# EAGLE board mikroAmpMeterV140_MainBoard (EAGLE 6.3)
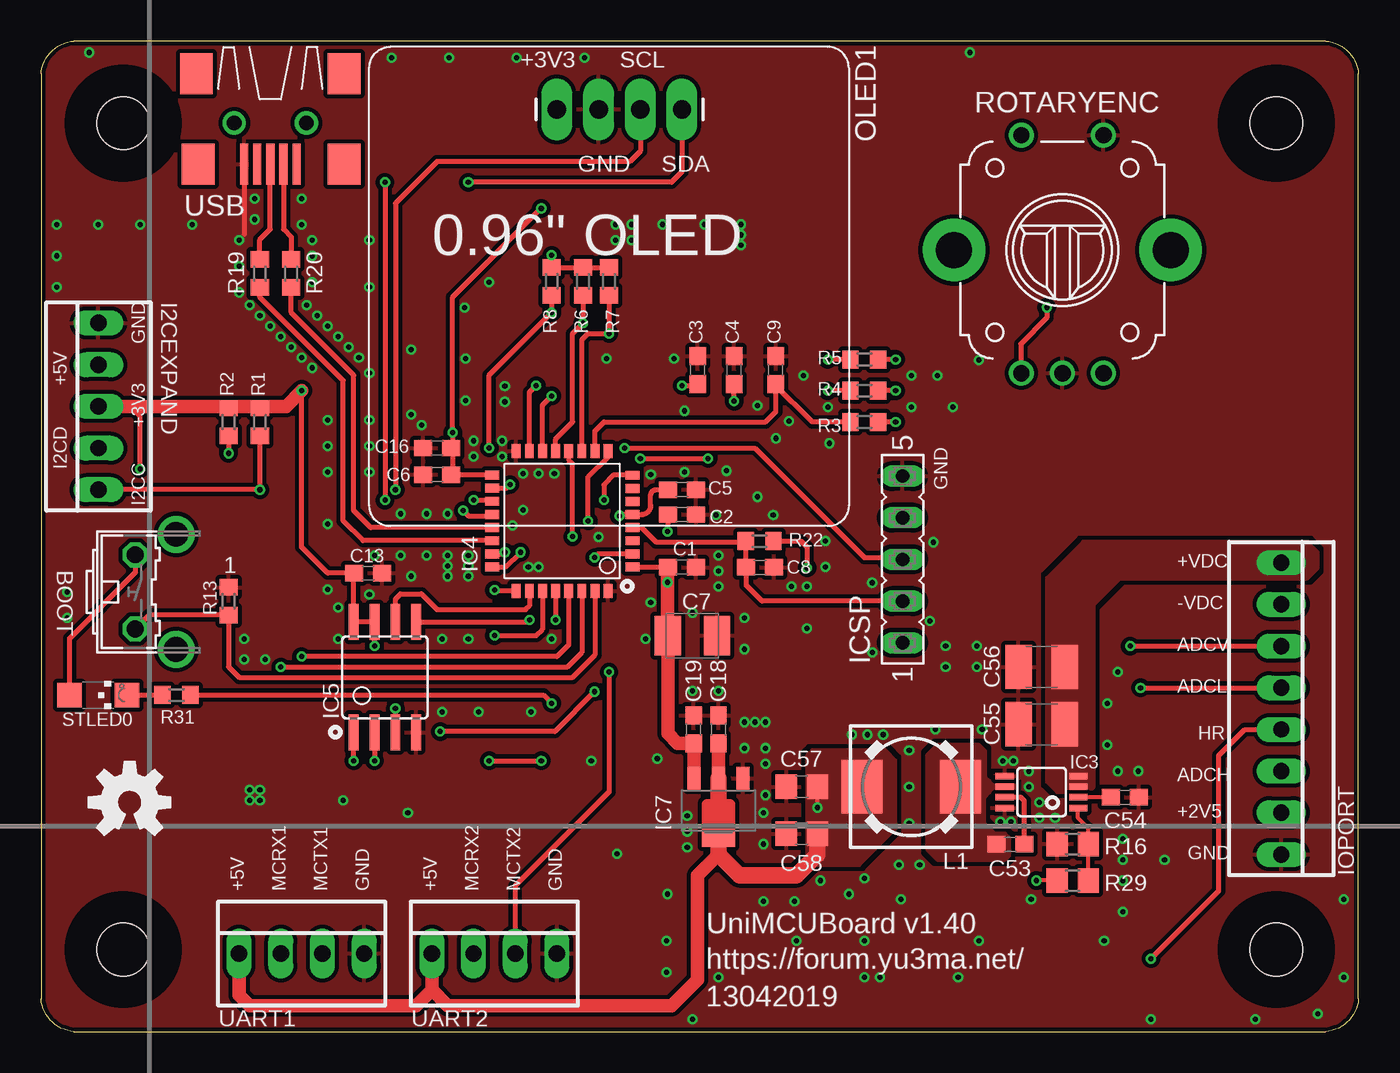
[diagram p0: board, top side]
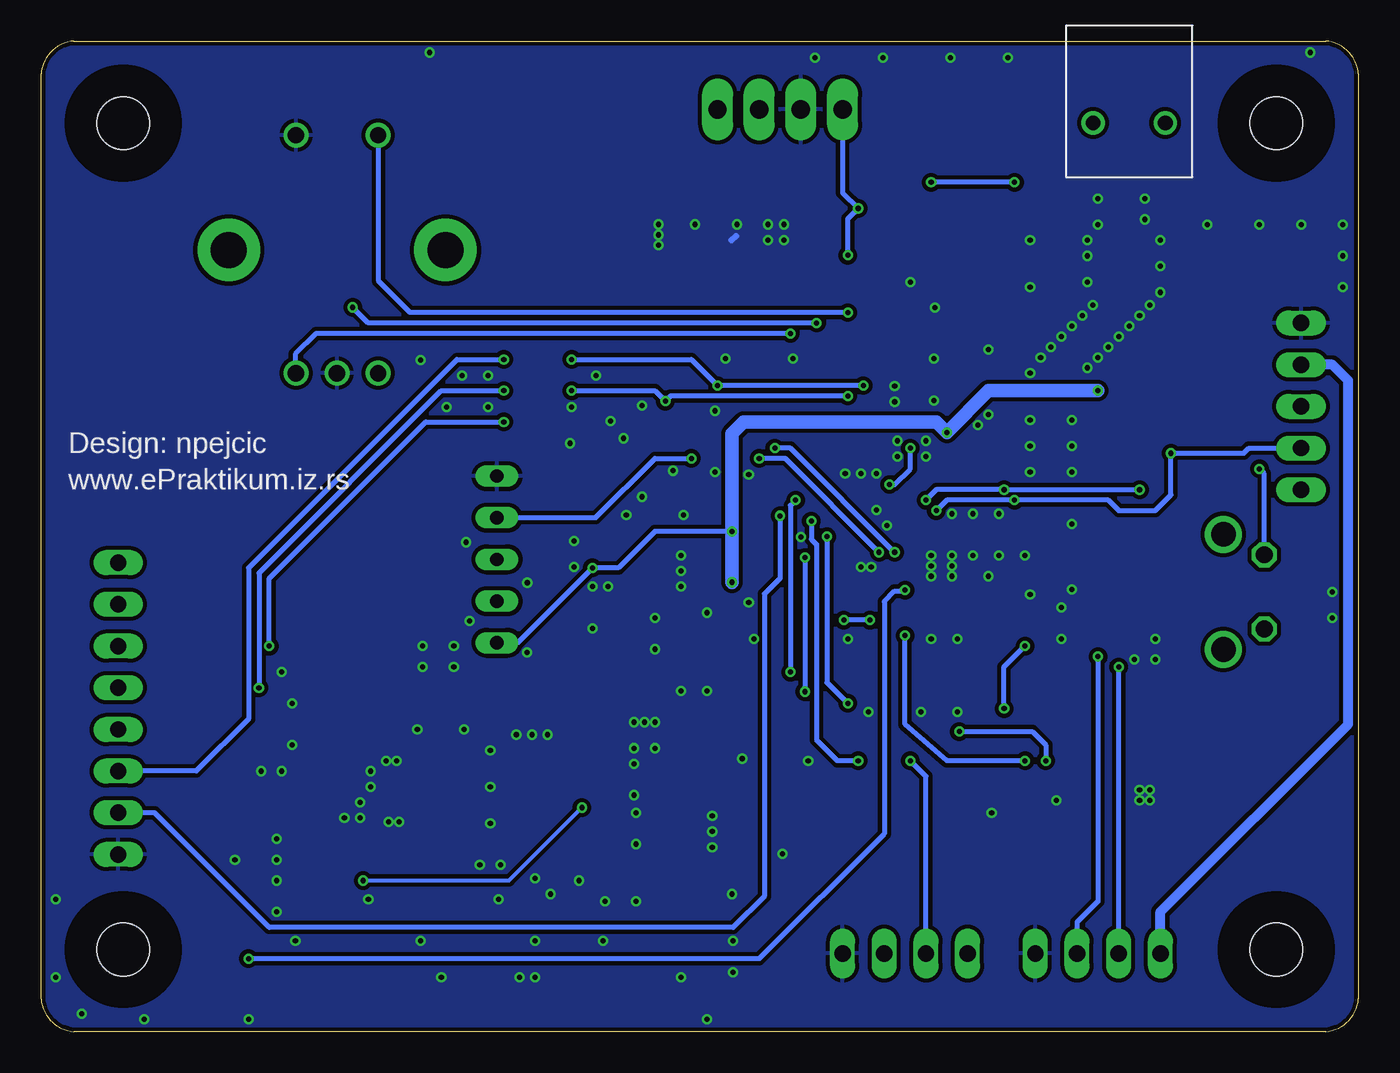
[diagram p1: board, bottom side, seen from below]

Size 80.27 x 60.36 mm. Coordinates in mm from the lower left corner, seen from the top.
Outline: 2,0 78.27,0 arc81 80.27,2 80.27,58.36 arc81 78.27,60.36 2,60.36 arc81 0,58.36 0,2 arc81 2,0
Copper layers (1*16): Top 0.035mm / dielectric 1.5mm / Bottom 0.035mm
Design rules "ITEADstudio_DRC": minimum track width 6mil, minimum drill 12mil, track to track 6mil, track to pad 6mil, pad to pad 6mil, via to via 6mil, smd to smd 0mil, copper to edge 10mil, drill to drill 10mil, minimum pad ring 10mil, minimum via ring 6mil, stop-mask expansion 2mil, vias tented up to drill 100mil, thermal gap 10mil
Holes 3.2 mm at 5,5 75.27,55.36 5,55.36 75.27,5
tRestrict: area 2,2 to 8,8; area 72.3,52.4 to 78.3,58.4; area 2,52.4 to 8,58.4; area 72.3,2 to 78.3,8
bRestrict: area 2,2 to 8,8; area 72.3,52.4 to 78.3,58.4; area 2,52.4 to 8,58.4; area 72.3,2 to 78.3,8

## Footprints (pad centres in the part's own frame; a part is rotated, then mirrored left to right if it is on the bottom)
B3F-31XX = drill 1.016 octagon: 1 -2.261,-1.245; 2 2.261,-1.245 | drill 1.499 pad 2.159: 3 -3.505,1.245; 4 3.505,1.245
C0603 = smd 1.1 x 1: 1 -0.85,0; 2 0.85,0
SMC_B = smd 1.6 x 2.4: + -1.5,0; - 1.5,0
C1210 = smd 1.6 x 2.7: 1 -1.4,0; 2 1.4,0
C0805 = smd 1.3 x 1.5: 1 -0.95,0; 2 0.95,0
22-23-2051 = drill 1 long: 1 -5.08,0; 2 -2.54,0; 3 0,0; 4 2.54,0; 5 5.08,0
MSOP8 = smd 0.4 x 1.1: 1 -0.975,-2.25; 2 -0.325,-2.25; 3 0.325,-2.25; 4 0.975,-2.25; 5 0.975,2.25; 6 0.325,2.25; 7 -0.325,2.25; 8 -0.975,2.25
LQFP32 = smd 0.54 x 0.85: 1 -2.8,-4.275; 2 -2,-4.275; 3 -1.2,-4.275; 4 -0.4,-4.275; 5 0.4,-4.275; 6 1.19,-4.275; 7 1.99,-4.275; 8 2.79,-4.275; 17 2.8,4.275; 18 2,4.275; 19 1.2,4.275; 20 0.4,4.275; 21 -0.4,4.275; 22 -1.2,4.275; 23 -2,4.275; 24 -2.8,4.275 | smd 0.85 x 0.54: 9 4.275,-2.8; 10 4.275,-2; 11 4.275,-1.2; 12 4.275,-0.4; 13 4.275,0.4; 14 4.275,1.2; 15 4.275,2; 16 4.275,2.8; 25 -4.275,2.8; 26 -4.275,2; 27 -4.275,1.2; 28 -4.275,0.4; 29 -4.275,-0.4; 30 -4.275,-1.2; 31 -4.275,-2; 32 -4.275,-2.8
SOIC8 = smd 0.6 x 2.2: 1 -1.905,-3.365; 2 -0.635,-3.365; 3 0.635,-3.365; 4 1.905,-3.365; 5 1.905,3.365; 6 0.635,3.365; 7 -0.635,3.365; 8 -1.905,3.365
SOT89 = smd 2.032 x 1.27: C@1 0,1.575 | smd 0.8 x 1.4: GND -1.499,-1.981; VIN 0,-1.981; VOUT 1.499,-1.981
FE05-1 = drill 0.813 long: 1 -5.08,0; 2 -2.54,0; 3 0,0; 4 2.54,0; 5 5.08,0
22-23-2081 = drill 1 long: 1 -8.89,0; 2 -6.35,0; 3 -3.81,0; 4 -1.27,0; 5 1.27,0; 6 3.81,0; 7 6.35,0; 8 8.89,0
DR73 = smd 2.5 x 3.25: 1 -3,0; 2 3,0
I2C_OLED_PACKAGE = drill 1.118 pad 1.88 long: 1 0,0; 2 2.54,0; 3 5.08,0; 4 7.62,0
R0603 = smd 1 x 1.1: 1 -0.85,0; 2 0.85,0
R0805 = smd 1.3 x 1.5: 1 -0.95,0; 2 0.95,0
PEC12_INCREMENTAL_ENCODER = drill 1: A -2.5,-7.5; B 2.5,-7.5; C 0,-7.5; P1 -2.5,7; P2 2.5,7 | drill 2.2 pad 3.81: GND@1 -6.6,0; GND@2 6.6,0
CHIPLED_1206 = smd 1.5 x 1.5: A 0,-1.75; C 0,1.75
22-23-2041 = drill 1 long: 1 -3.81,0; 2 -1.27,0; 3 1.27,0; 4 3.81,0
USB-MB-S = smd 2.5 x 0.5: D+ 2.5,0; D- 2.5,0.8; GND 2.5,-1.6; ID 2.5,-0.8; VBUS 2.5,1.6 | smd 2.5 x 2: P$1 -3,-4.5; P$2 -3,4.5; P$3 2.5,-4.4; P$4 2.5,4.5 | drill 0.9: P$5 0,2.2; P$6 0,-2.2

## Placement (x,y rotation side)
BOOT  [B3F-31XX]  6.99,26.8 270 top
C1  100nF  [C0603]  39.05,28.3 0 top
C2  10uF/6.3V  [C0603]  39.05,31.51 0 top
C3  10nF  [C0603]  40.01,40.32 90 top
C4  10nF  [C0603]  42.23,40.32 90 top
C5  1uF  [C0603]  39.05,33.02 0 top
C6  100nF  [C0603]  24.13,33.93 0 top
C7  100uF/6.3V TANT  [SMC_B]  39.69,24.13 0 top
C8  100nF  [C0603]  43.81,28.3 180 top
C9  10nF  [C0603]  44.77,40.32 90 top
C13  100n  [C0603]  19.92,27.94 180 top
C16  10uF/6.3V  [C0603]  24.13,35.56 0 top
C18  10uF/16V  [C0603]  41.27,18.41 90 top
C19  10uF/16V  [C0603]  39.77,18.41 90 top
C53  100nF  [C0603]  59.05,11.43 180 top
C54  1uF/16V  [C0603]  66.04,14.29 180 top
C55  4.7uF/50V  [C1210]  60.96,18.73 180 top
C56  4.7uF/50V  [C1210]  60.96,22.23 180 top
C57  10uF/16V  [C0805]  46.35,14.92 180 top
C58  10uF/16V  [C0805]  46.35,12.06 180 top
I2CEXPAND  22-23-2051  [22-23-2051]  3.49,38.1 90 top
IC3  MCP16312-E/MS  [MSOP8]  60.96,14.61 90 top
IC4  STM32L082KZT6  [LQFP32]  31.75,31.11 90 top
IC5  SST26VF032B-104I/SM  [SOIC8]  20.95,21.59 0 top
IC7  MCP1700T-3302E/MB  [SOT89]  41.27,13.46 180 top
ICSP  [FE05-1]  52.49,28.77 90 top
IOPORT  22-23-2081  [22-23-2081]  75.56,19.68 270 top
L1  22uH  [DR73]  53.02,14.92 180 top
LOGO1  OSHW-LOGOM  [OSHW-LOGO-M]  5.4,13.97 0 top
OLED1  WEA012864DWPP3N00003  [I2C_OLED_PACKAGE]  31.43,56.2 0 top
R1  4k7  [R0603]  13.34,37.15 90 top
R2  4k7  [R0603]  11.43,37.15 90 top
R3  1k  [R0603]  50.16,37.15 180 top
R4  1k  [R0603]  50.16,39.05 180 top
R5  1k  [R0603]  50.16,40.96 180 top
R6  4k7  [R0603]  33.02,45.72 90 top
R7  4k7  [R0603]  34.61,45.72 90 top
R8  4k7  [R0603]  31.11,45.72 90 top
R13  10k  [R0603]  11.43,26.23 90 top
R16  10k  [R0805]  62.87,11.43 0 top
R19  10R  [R0603]  13.34,46.2 90 top
R20  10R  [R0603]  15.24,46.2 90 top
R22  1k  [R0603]  43.77,29.89 0 top
R29  52.3k  [R0805]  62.87,9.21 180 top
R31  220  [R0603]  8.26,20.51 180 top
ROTARYENC  PEC12R-2217F-S0024  [PEC12_INCREMENTAL_ENCODER]  62.23,47.62 0 top
STLED0  [CHIPLED_1206]  3.49,20.51 270 top
UART1  22-23-2041  [22-23-2041]  15.88,4.76 0 top
UART2  22-23-2041  [22-23-2041]  27.62,4.76 0 top
USB  USB-MB-S  [USB-MB-S]  13.97,55.37 270 top

## Library data of the parts
BOOT = switch-omron
C1-C9 C13 C16 C18 C19 C53-C58 R1-R8 R13 R16 R19 R20 R22 R29 R31 = rcl
I2CEXPAND = con-molex; MF: MOLEX; MPN: 22-23-2051; OC_FARNELL: 1462952; OC_NEWARK: 38C9178
IC3 = nebojsa_laptop
IC4 = micro-stm_v3
IC5 = at45dataflash
IC7 = linear
ICSP = con-lsta
IOPORT = con-molex; MF: MOLEX; MPN: 22-23-2081; OC_FARNELL: 1756826; OC_NEWARK: 01C7592
L1 = inductors
LOGO1 = SparkFun-Aesthetics
OLED1 = DIYMall_OLED
ROTARYENC = dp_devices_v6
STLED0 = led
UART1 UART2 = con-molex; MF: MOLEX; MPN: 22-23-2041; OC_FARNELL: 1462920; OC_NEWARK: 38C0355
USB = con-usb

## Nets
+2V5: C5.1 IC4.5 IOPORT.7
+3V3: BOOT.1 C1.1 C2.1 C6.2 C7.+ C13.2 C16.2 C19.1 I2CEXPAND.3 IC4.1 IC4.17 IC5.3 IC5.7 IC5.8 IC7.VOUT ICSP.1 OLED1.1 R1.2 R2.2 R6.2 R7.2 R8.2 R22.2 STLED0.A
+5V: C18.1 C57.1 C58.1 I2CEXPAND.4 IC7.VIN L1.2 R29.2 UART1.1 UART2.1
+VDC: C55.1 C56.1 IC3.3 IC3.4 IOPORT.1
-VDC: IOPORT.2
ADC_HIGH: IOPORT.6 R5.1
ADC_LOW: IOPORT.4 R4.1
ADC_VOLT: IOPORT.3 R3.1
ADH: C3.1 IC4.15 R5.2
ADL: C4.1 IC4.14 R4.2
ADV: C9.1 IC4.10 R3.2
BOOTB: BOOT.2 IC4.31 R13.1
FB: IC3.1 R16.2 R29.1
FLASH_CS: IC4.2 IC5.1
GND: C1.2 C2.2 C3.2 C4.2 C5.2 C6.1 C7.- C8.1 C9.2 C13.1 C16.1 C18.2 C19.2 C54.1 C55.2 C56.2 C57.2 C58.2 I2CEXPAND.5 IC3.5 IC3.8 IC4.16 IC4.32 IC5.4 IC7.GND ICSP.5 IOPORT.8 OLED1.2 R13.2 R16.1 ROTARYENC.C ROTARYENC.P2 UART1.4 UART2.4 USB.GND
HIGH_RANGE: IC4.25 IOPORT.5
I2CSCL: I2CEXPAND.1 IC4.19 OLED1.3 R1.1
I2CSDA: I2CEXPAND.2 IC4.20 OLED1.4 R2.1
MC_RXD1: IC4.30 UART1.2
MC_RXD2: IC4.9 UART2.2
MC_TXD1: IC4.29 UART1.3
MC_TXD2: IC4.8 UART2.3
N$6: R19.2 USB.D+
N$20: R20.2 USB.D-
N$24: C53.1 IC3.7
N$27: C54.2 IC3.2
NRST: C8.2 IC4.4 ICSP.2 R22.1
ROTA: IC4.13 R6.1 ROTARYENC.A
ROTB: IC4.11 R7.1 ROTARYENC.B
ROTP: IC4.18 R8.1 ROTARYENC.P1
SPI1_MISO: IC4.27 IC5.2
SPI1_MOSI: IC4.28 IC5.5
SPI1_SCK: IC4.26 IC5.6
STAT_LED: R31.2 STLED0.C
STLED0: IC4.12 R31.1
SW: C53.2 IC3.6 L1.1
SYS_SWCLK: IC4.24 ICSP.4
SYS_SWDIO: IC4.23 ICSP.3
USBDM: IC4.21 R20.1
USBDP: IC4.22 R19.1

## Tracks (layer width: path | path; a pad name or v marks a point on that pad's centre or on a via)
+2V5  (via drill 0.31)
  Top 0.305: v35.24,31.43 35.33,31.52 IC4.5 36.59,31.52 arc90 37.15,32.07 37.15,32.7 arc-90 37.47,33.02 C5.1
  Bottom 0.305: v35.24,31.43 35.24,27.62 36.2,26.67 36.2,8.26 38.1,6.35 66.36,6.35 73.34,13.34 IOPORT.7
+3V3  (via drill 0.31)
  Top 0.305: IC4.17 25,33.91 C6.2 25.08,34.04 v25.08,36.51 | C2.1 38.2,31.41 v38.18,30.48 | IC4.1 38.19,28.32 C1.1 | v25.08,36.51 25.08,35.66 C16.2 | v25.08,36.51 25.08,44.77 v30.48,50.16 | R22.2 46.31,29.89 46.67,29.53 v46.67,28.26 | R2.2 11.64,38 11.75,38.1 | R1.2 14.19,38 14.29,38.1 | STLED0.A 1.74,23.97 5.74,27.96 BOOT.1 | v6.03,34.29 6.03,37.47 5.4,38.1 | v15.88,39.05 15.88,29.53 17.46,27.94 C13.2 19.05,27.73 IC5.8 IC5.7 v20.32,23.5 | IC5.3 v21.59,19.68 | R7.2 R6.2 R8.2 v31.11,47.31
  Top 0.406: C19.1 39.69,16.51 | 38.18,28.27 C1.1
  Top 0.813: IC7.VOUT 39.78,17.16 C19.1 38.79,17.57 38.19,18.17 C7.+ v38.18,27.38 38.18,28.27 | I2CEXPAND.3 5.4,38.1 11.75,38.1 14.29,38.1 14.92,38.1 v15.88,39.05
  Bottom 0.305: ICSP.1 51.24,23.69 v46.67,28.26 45.09,28.26 42.86,30.48 v38.18,30.48 | BOOT.1 5.74,34 v6.03,34.29 | OLED1.1 31.43,51.12 v30.48,50.16 31.11,49.53 v31.11,47.31 | v21.59,19.68 21.59,22.23 v20.32,23.5
  Bottom 0.813: v38.18,27.38 v38.18,30.48 38.18,36.43 37.47,37.15 25.72,37.15 v25.08,36.51 22.54,39.05 v15.88,39.05
+5V  (via drill 0.31)
  Top 0.254: R29.2 v60.64,9.21 | v47.31,13.65 C57.1
  Top 0.813: IC7.VIN C18.1 | 41.27,10.79 40.01,9.53 40.01,3.17 38.42,1.59 24.77,1.59 23.81,2.54 | UART1.1 12.06,2.22 12.7,1.59 22.86,1.59 23.81,2.54 | UART2.1 23.81,2.54
  Top 1.016: IC7.VIN 41.27,10.79 42.55,9.53 46.04,9.53 47.31,10.79 C58.1
  Bottom 0.254: v60.64,9.21 51.75,9.21 v47.31,13.65
  Bottom 0.61: UART1.1 12.06,7.3 0.64,18.73 0.64,39.69 1.59,40.64 I2CEXPAND.4
  pour Top (isolate 0.254, no thermals): 51.44,17.14 46.99,17.14 46.67,16.83 46.67,10.16 49.85,10.16 52.07,12.38 52.07,16.51
+VDC
  pour Top (isolate 0.254, no thermals): 65.72,27.62 77.15,27.62 77.79,28.26 77.79,29.21 77.15,29.84 63.5,29.84 61.28,27.62 61.28,15.24 61.91,14.61 63.82,14.61 64.14,14.92 64.14,26.04
ADC_HIGH  (via drill 0.31)
  Top 0.305: v52.07,40.96 R5.1
  Bottom 0.305: IOPORT.6 70.8,15.88 67.63,19.05 67.63,28.26 54.93,40.96 v52.07,40.96
ADC_LOW  (via drill 0.31)
  Top 0.305: v66.99,20.95 IOPORT.4 | v52.07,39.05 R4.1
  Bottom 0.305: v66.99,20.95 66.99,27.94 55.88,39.05 v52.07,39.05
ADC_VOLT  (via drill 0.31)
  Top 0.305: v66.36,23.5 IOPORT.3 | v52.07,37.15 R3.1
  Bottom 0.305: v52.07,37.15 56.83,37.15 66.36,27.62 v66.36,23.5
ADH  (via drill 0.31)
  Top 0.305: IC4.15 29.75,38.96 v30.16,39.37 | v39.05,39.37 39.9,39.37 C3.1 | R5.2 v47.94,40.96
  Bottom 0.305: v30.16,39.37 v39.05,39.37 40.64,40.96 v47.94,40.96
ADL  (via drill 0.31)
  Top 0.305: IC4.14 30.55,38.17 v31.11,38.73 | v42.23,38.42 C4.1 | R4.2 v47.94,39.05
  Bottom 0.305: v31.11,38.73 41.91,38.73 v42.23,38.42 42.86,39.05 v47.94,39.05
ADV
  Top 0.305: IC4.10 33.75,36.61 34.29,37.15 44.13,37.15 44.77,37.78 C9.1 44.66,39.47 46.99,37.15 R3.2
BOOTB
  Top 0.305: R13.1 11.14,25.4 11.43,25.4 R13.1 | IC4.31 33.75,22.95 32.38,21.59 12.06,21.59 11.43,22.23 R13.1 | R13.1 6.58,25.38 BOOT.2
FB
  Top 0.254: R29.1 R16.2 63.81,12.38 63.18,13.02 63.18,13.6 IC3.1
FLASH_CS  (via drill 0.31)
  Top 0.305: IC4.2 33.96,29.11 v33.73,28.89 | v33.73,20.72 31.3,18.29 v24.32,18.29 | v19.05,16.51 IC5.1
  Bottom 0.305: v33.73,28.89 v33.73,20.72 | v24.32,18.29 19.88,18.29 19.05,17.46 v19.05,16.51
GND  (via drill 0.31)
  Top 0.305: USB.GND 12.38,52.86 12.38,48.58
  Top 0.406: ICSP.5 52.39,33.96
  Top 0.61: ICSP.5 52.45,33.9
  Top 0.813: ICSP.5 51.7,33.85
  Bottom 0.406: 52.49,34.31 ICSP.5 | 37.94,48.49 38.19,48.23
  other vias: 16.51,48.22 26.04,29.02 54.15,25.02 46.67,27.11 42.86,23.3 42.86,25.21 67.63,0.76 79.38,8.06 79.38,3.3 38.1,5.52 41.27,3.3 73.98,0.76 39.69,0.76 77.79,1.08 50.16,3.3 51.12,3.3 50.16,5.52 46.04,5.52 44.13,16.32 44.13,14.41 60.33,8.06 52.39,8.06 44.13,17.27 1.59,25.21 26.04,28.38 24.77,29.02 39.37,11.24 39.37,13.14 12.7,14.73 13.34,14.73 12.7,14.1 13.34,14.1 38.18,8.38 26.04,27.75 24.77,27.75 24.77,28.38 22.54,27.75 12.38,23.94 18.41,14.1 41.27,27.11 41.27,28.07 41.27,29.02 35.08,10.84 45.72,27.11 42.86,17.27 36.83,23.94 37.15,26.16 39.69,25.53 46.67,24.57 38.1,3.62 43.66,38.15 17.46,26.95 20,48.22 16.51,45.68 16.51,47.27 22.54,41.55 27.3,45.68 20,45.36 25.81,44.11 42.63,47.92 42.63,48.55 46.44,39.98 48.03,35.85 23.18,36.96 20,37.27 20,34.1 23.5,31.56 35.01,48.23 35.97,48.23 2.95,59.66 39.37,12.19 30.32,34.02 29.37,34.02 29.37,31.8 28.73,30.85 29.69,28.31 30.32,28.31 25.88,38.47 38.58,41.01 45.56,37.2 43.66,32.59 37.15,33.94 41.12,31.48 50.64,27.35 34.45,41.01 39.21,37.83 25.88,41.01 65.6,15.88 52.9,17.14 43.5,18.86 42.86,18.86 44.13,18.86 49.21,8.38 50.16,9.33 50.66,23.11 12.06,48.22 12.06,46.63 12.06,45.05 17.46,34.1 26.35,35.05 26.35,36 28.1,36 28.1,35.05 31.27,34.02 1.59,26.8 17.46,30.92 39.21,34.1 41.75,34.18 35.01,49.19 35.97,49.19 37.87,49.19 40.41,49.19 42.63,49.19 57.15,40.92 13.02,49.49 15.88,49.17 15.88,50.76 9.21,49.17 0.95,49.17 0.95,45.36 0.95,47.27 3.49,49.17 6.03,49.17 37.54,16.64 33.97,30.13 52.9,12.7 60.83,13.97 60.83,13.02 52.9,14.92 55.88,3.3 57.15,5.52 68.45,10.48 22.35,13.34 64.77,5.52 44.61,31.48 47.78,29.89 47.78,28.31 59.09,12.78 58.45,12.78 61.79,13.02 60.2,14.92 60.2,15.88 58.61,16.51 59.25,16.51 66.87,15.88 65.6,21.91 64.96,17.46 64.96,20 65.91,9.21 65.91,11.75 65.91,10.48 57.02,22.23 57.02,23.5 55.12,23.5 55.12,22.23 54.48,18.41 57.34,18.41 44.01,7.94 44.01,13.34 33.53,16.51 44.01,11.43 45.91,7.94 65.91,7.3 47.5,9.21 50.36,18.1 49.4,18.1 51.31,18.1 52.26,10.16 53.53,10.16 33.11,59.35 28.98,59.35 24.85,59.35 21.36,59.35 56.6,59.66 54.38,29.82 22.54,37.59 24.77,31.56 21.91,31.56 20,35.69 17.46,35.69 17.46,37.27 12.7,44.26 16.19,44.26 19.37,41.08 20,40.13 23.5,29.02 21.91,29.02 20.32,29.02 24.45,23.94 26.04,23.94 31.11,23.94 28.26,39.33 28.26,38.38 44.77,36.16 47.94,38.06 53.02,38.06 55.56,38.06 54.61,39.97 53.02,39.97 13.34,43.62 13.97,42.99 14.61,42.35 16.83,43.62 17.46,42.99 18.1,42.35 18.73,41.72 15.24,41.72 15.88,41.08 16.51,40.45 13.02,50.76 20,26.63 12.38,22.67 13.65,22.67 18.1,23.94 18.1,25.84 24.45,19.49 26.67,19.49 29.84,19.49 39.69,20.76 41.27,20.76
  pour Top (isolate 0.254, rank 2): -0.44,61.09 99.06,61.09 99.38,-0.32 69.85,-0.32 68.9,-0.25 -0.44,-0.25
  pour Bottom (isolate 0.254, rank 2): -0.44,61.09 -0.44,-0.25 67.94,-0.25 68.58,-0.32 99.38,-0.32 99.06,61.09
HIGH_RANGE  (via drill 0.31)
  Top 0.305: v67.63,4.45 71.75,8.57 71.75,16.83 73.34,18.41 IOPORT.5 | IC4.25 27.69,26.84 v27.62,26.91
  Bottom 0.305: v67.63,4.45 36.51,4.45 28.89,12.06 28.89,26.2 28.26,26.84 27.69,26.84 v27.62,26.91
I2CSCL  (via drill 0.31)
  Top 0.305: I2CEXPAND.1 v13.34,33.02 R1.1 | 27.47,32.31 IC4.19 27.41,32.38 v26.35,32.38 | v21.59,33.02 21.59,50.48 24.13,53.02 35.88,53.02 36.51,53.66 OLED1.3
  Bottom 0.305: v13.34,33.02 v21.59,33.02 25.72,33.02 v26.35,32.38
I2CSDA  (via drill 0.31)
  Top 0.305: v25.72,31.75 26.04,31.43 27.39,31.43 IC4.20 | v26.04,51.75 38.42,51.75 39.05,52.39 OLED1.4 | v20.95,51.75 v20.95,32.38 | R2.1 v11.43,35.24
  Bottom 0.305: I2CEXPAND.2 6.67,35.56 6.99,35.24 v11.43,35.24 11.43,32.7 12.38,31.75 14.61,31.75 15.24,32.38 v20.95,32.38 25.08,32.38 v25.72,31.75 | v20.95,51.75 v26.04,51.75
MC_RXD1  (via drill 0.31)
  Top 0.305: v14.61,22.23 32.07,22.23 32.95,23.11 IC4.30
  Bottom 0.305: UART1.2 v14.61,22.23
MC_RXD2  (via drill 0.31)
  Top 0.305: v33.34,31.11 33.34,33.81 34.55,35.03 IC4.9 | v27.3,16.51 v30.48,16.51
  Bottom 0.305: v33.34,31.11 33.34,30 33.02,29.69 33.02,17.78 31.75,16.51 v30.48,16.51 | UART2.2 26.35,15.56 v27.3,16.51
MC_TXD1  (via drill 0.31)
  Top 0.305: IC4.29 32.15,23.58 31.43,22.86 v15.88,22.86
  Bottom 0.305: v15.88,22.86 15.88,7.94 17.14,6.67 UART1.3
MC_TXD2  (via drill 0.31)
  Top 0.305: IC4.8 34.86,33.91 34.29,33.34 v34.29,32.38 | v34.61,21.91 34.61,14.61 28.89,8.89 UART2.3
  Bottom 0.305: v34.29,32.38 34.61,32.07 v34.61,21.91
N$6
  Top 0.305: R19.2 13.34,48.26 13.97,48.9 USB.D+
N$20
  Top 0.305: USB.D- 14.77,48.89 15.24,48.42 R20.2
N$24
  Top 0.305: C53.1 59.91,14.07 59.69,14.29 IC3.7
N$27
  Top 0.254: C54.2 IC3.2
NRST
  Top 0.305: IC4.4 36.59,30.71 37.47,29.84 42.88,29.84 R22.1 42.96,29.85 C8.2 42.96,27.21 43.93,26.23 ICSP.2
ROTA  (via drill 0.31)
  Top 0.305: v61.28,44.13 61.28,43.5 59.69,41.91 59.69,40.16 ROTARYENC.A | IC4.13 31.35,36.11 32.38,37.15 32.38,42.55 v33.02,43.18 R6.1
  Bottom 0.305: v33.02,43.18 60.33,43.18 v61.28,44.13
ROTB  (via drill 0.31)
  Top 0.305: IC4.11 32.95,42.16 33.34,42.55 v34.61,42.55 R7.1
  Bottom 0.305: v34.61,42.55 63.5,42.55 64.77,41.27 64.77,40.16 ROTARYENC.B
ROTP  (via drill 0.31)
  Top 0.305: IC4.18 28.35,33.12 v28.57,33.34 | v27.3,35.56 27.3,40.01 v31.11,43.81 R8.1
  Bottom 0.305: v28.57,33.34 28.26,33.34 27.3,34.29 v27.3,35.56 | v31.11,43.81 57.78,43.81 59.69,45.72 59.69,54.59 ROTARYENC.P1
SPI1_MISO  (via drill 0.31)
  Top 0.305: IC5.2 v20.32,16.51 | v27.62,24.13 30.16,24.13 30.55,24.52 IC4.27
  Bottom 0.305: v20.32,16.51 25.08,16.51 27.62,18.73 v27.62,24.13
SPI1_MOSI  (via drill 0.31)
  Top 0.305: IC5.5 29.64,24.96 v29.77,25.08 | IC4.28 31.35,25.32 v31.35,25.08
  Bottom 0.305: v29.77,25.08 v31.35,25.08
SPI1_SCK
  Top 0.305: IC5.6 21.59,26.35 21.91,26.67 23.18,26.67 24.13,25.72 29.53,25.72 29.75,25.94 IC4.26
STAT_LED
  Top 0.305: STLED0.C R31.2
STLED0  (via drill 0.31)
  Top 0.305: R31.1 30.61,20.51 v31.11,20 | v32.38,30.16 32.38,34.61 32.15,34.84 IC4.12
  Bottom 0.305: v32.38,30.16 32.38,21.27 v31.11,20
SW
  pour Top (isolate 0.254, no thermals): 58.74,12.06 58.1,12.06 57.47,12.7 57.47,14.29 57.78,14.61 59.21,14.61 59.37,14.76 59.37,15.08 59.21,15.24 57.78,15.24 57.55,15.48 57.55,17.07 57.15,17.46 54.61,17.46 53.98,16.83 53.98,11.11 54.61,10.48 58.74,10.48 59.05,10.79 59.05,11.75
SYS_SWCLK  (via drill 0.31)
  Top 0.305: IC4.24 28.32,28.32 v29.21,29.21 | v36.51,34.92 v40.64,34.92
  Bottom 0.305: v29.21,29.21 34.92,34.92 v36.51,34.92 | ICSP.4 46.47,31.31 42.86,34.92 v40.64,34.92
SYS_SWDIO  (via drill 0.31)
  Top 0.305: IC4.23 28.16,29.11 v28.26,29.21 | v35.56,35.56 43.5,35.56 50.16,28.89 52.37,28.89 ICSP.3
  Bottom 0.305: v28.26,29.21 34.61,35.56 v35.56,35.56
USBDM
  Top 0.305: IC4.21 20.09,30.71 19.05,31.75 19.05,40.01 15.24,43.81 R20.1
USBDP
  Top 0.305: IC4.22 19.61,29.91 18.41,31.11 18.41,39.69 13.34,44.77 R19.1

## Text on the board
tPlace: +3V3 | SCL | GND | SDA | GND | +5V | +3V3 | I2CD | GND | I2CC | 1 | +VDC | -VDC | ADCV | ADCL | HR | ADCH | +2V5 | GND | +5V | MCRX1 | MCTX1 | GND | +5V | MCRX2 | MCTX2 | GND
tNames: UniMCUBoard v1.40 | https://forum.yu3ma.net/ | 13042019
bNames: Design: npejcic | www.ePraktikum.iz.rs